# Altium PCB main.PcbDoc
Units mil, origin at the board's own origin, x right, y up, seen from the top; angles counter-clockwise.
Board outline 21485 x 13020 mil, 2 copper layers (Top Layer, Bottom Layer); 70 components, 79 nets, 285 pads, 0 vias.
Unrouted connection lines stored in the file: 74.
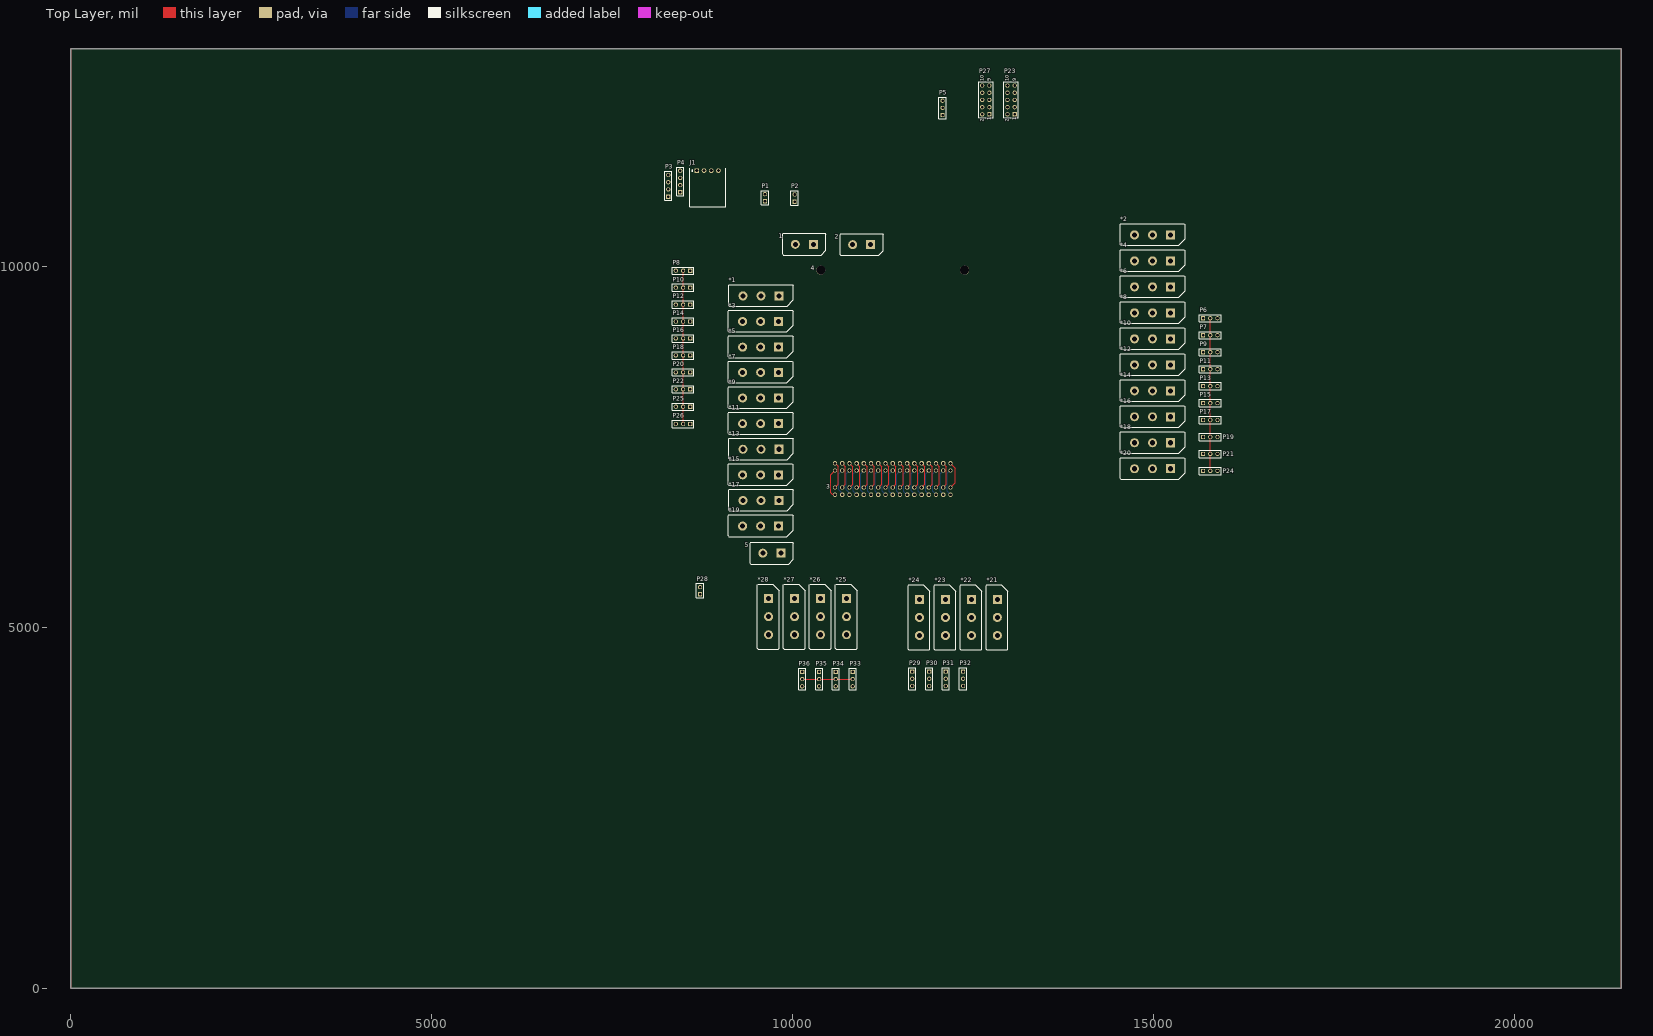
[diagram p0: Top Layer view]
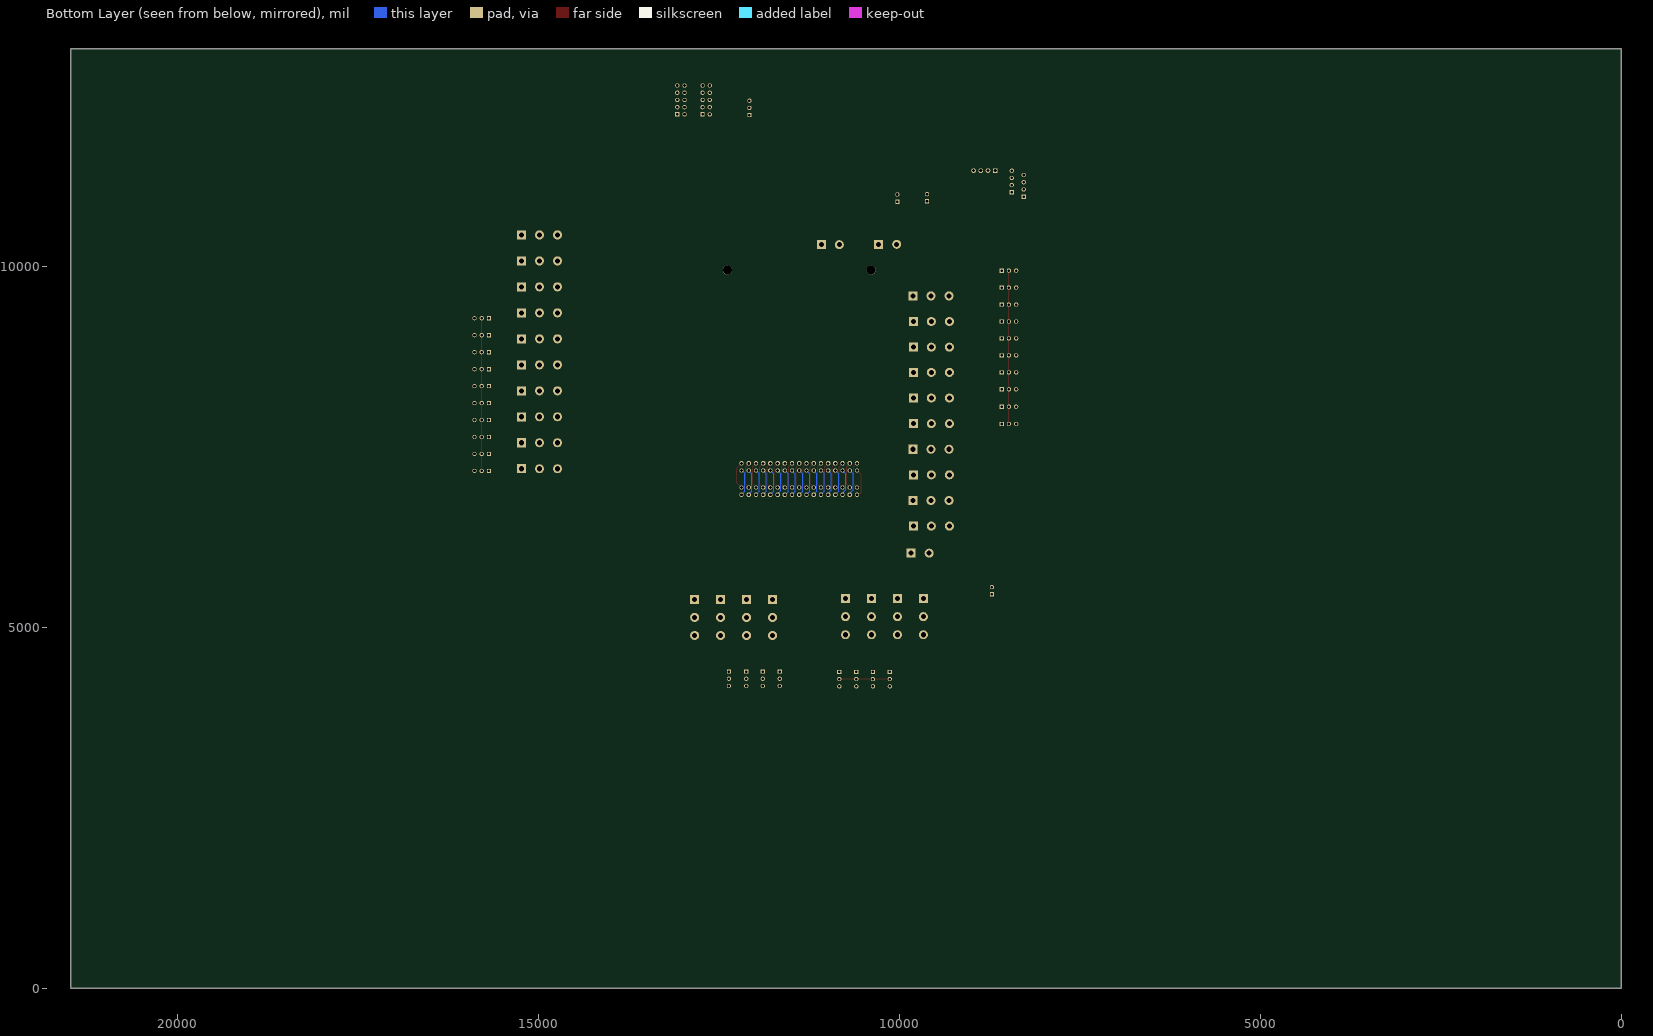
[diagram p1: Bottom Layer view, seen from below]

## Layer stack, top to bottom
Top Solder: solder mask 0.4, Solder Resist, Dk 3.5
Top Layer: signal copper 1.4
Dielectric 1: dielectric 12.6, FR-4, Dk 4.8
Bottom Layer: signal copper 1.4
Bottom Solder: solder mask 0.4, Solder Resist, Dk 3.5

## Board outline
0,0 21485,0 21485,13020 0,13020

## Design rules (kind name [scope] priority, off if disabled: settings)
Clearance [All] p1: gap=10 ignorepadtopadclearanceinfootprint=FALSE except(0: Arc-Hole Track-Hole SMDPad-Hole THPad-Hole Via-Hole Fill-Hole Poly-Hole Region-Hole Text-Hole)
PolygonConnect [All] p1: connectstyle=Relief reliefconductorwidth=10 reliefentries=4 polygonreliefangle="90 Angle" airgapwidth=10
RoutingVias [All] p1: holewidth=28 width=50 viastyle="Through Hole" minholewidth=28 minwidth=50 maxholewidth=28 maxwidth=50
SolderMaskExpansion [All] p1: expansion=4
Width [All] p1: maxlimit=10 minlimit=10 preferedwidth=10
30 further rules are at their usual default settings.

## Components (designator, comment, footprint, x,y, rotation, side; value= is the part's Value field where it differs from the comment)
1 "Component_1" 2pinmolex 10290,10310 r180 top
2 "Component_1" 2pinmolex 11085,10305 r180 top
3 "RREXTENSION-MALE" RREXT-MALE 11390,6890 r180 top
4 "RRINTERFACE-FEMALE" RRINT-FEMALE 11390,7225 r180 top
5 "Component_1" 2pinmolex 9840,6030 r180 top
*1 "Component_1" 3pinmolex 9815,9595 r180 top
*2 "Component_1" 3pinmolex 15240,10440 r180 top
*3 "Component_1" 3pinmolex 9810,9240 r180 top
*4 "Component_1" 3pinmolex 15240,10080 r180 top
*5 "Component_1" 3pinmolex 9810,8885 r180 top
*6 "Component_1" 3pinmolex 15240,9720 r180 top
*7 "Component_1" 3pinmolex 9810,8535 r180 top
*8 "Component_1" 3pinmolex 15240,9360 r180 top
*9 "Component_1" 3pinmolex 9810,8180 r180 top
*10 "Component_1" 3pinmolex 15240,9000 r180 top
*11 "Component_1" 3pinmolex 9810,7825 r180 top
*12 "Component_1" 3pinmolex 15240,8640 r180 top
*13 "Component_1" 3pinmolex 9815,7470 r180 top
*14 "Component_1" 3pinmolex 15240,8280 r180 top
*15 "Component_1" 3pinmolex 9810,7115 r180 top
*16 "Component_1" 3pinmolex 15240,7920 r180 top
*17 "Component_1" 3pinmolex 9815,6760 r180 top
*18 "Component_1" 3pinmolex 15240,7560 r180 top
*19 "Component_1" 3pinmolex 9810,6405 r180 top
*20 "Component_1" 3pinmolex 15240,7200 r180 top
*21 "Component_1" 3pinmolex 12840,5390 r270 top
*22 "Component_1" 3pinmolex 12480,5390 r270 top
*23 "Component_1" 3pinmolex 12120,5390 r270 top
*24 "Component_1" 3pinmolex 11760,5390 r270 top
*25 "Component_1" 3pinmolex 10750,5400 r270 top
*26 "Component_1" 3pinmolex 10390,5400 r270 top
*27 "Component_1" 3pinmolex 10030,5400 r270 top
*28 "Component_1" 3pinmolex 9670,5400 r270 top
J1 "0705530003" *MOLEX_0705530003 8675,11330 r0 top
P1 "Header 2" HDR1X2 9620,10905 r90 top
P2 "Header 2" HDR1X2 10030,10900 r90 top
P3 "Header 4" HDR1X4 8280,10970 r90 top
P4 "Header 4" HDR1X4 8445,11030 r90 top
P5 "Header 3" HDR1X3 12080,12100 r90 top
P6 "Header 3" HDR1X3 15690,9285 r0 top
P7 "Header 3" HDR1X3 15690,9050 r0 top
P8 "Header 3" HDR1X3 8585,9945 r180 top
P9 "Header 3" HDR1X3 15690,8815 r0 top
P10 "Header 3" HDR1X3 8585,9710 r180 top
P11 "Header 3" HDR1X3 15690,8580 r0 top
P12 "Header 3" HDR1X3 8585,9475 r180 top
P13 "Header 3" HDR1X3 15690,8345 r0 top
P14 "Header 3" HDR1X3 8585,9240 r180 top
P15 "Header 3" HDR1X3 15690,8110 r0 top
P16 "Header 3" HDR1X3 8585,9005 r180 top
P17 "Header 3" HDR1X3 15690,7875 r0 top
P18 "Header 3" HDR1X3 8585,8770 r180 top
P19 "Header 3" HDR1X3 15690,7640 r0 top
P20 "Header 3" HDR1X3 8585,8535 r180 top
P21 "Header 3" HDR1X3 15690,7405 r0 top
P22 "Header 3" HDR1X3 8585,8300 r180 top
P23 "Header 5X2" HDR2X5 13080,12110 r90 top
P24 "Header 3" HDR1X3 15690,7170 r0 top
P25 "Header 3" HDR1X3 8585,8060 r180 top
P26 "Header 3" HDR1X3 8585,7820 r180 top
P27 "Header 5X2" HDR2X5 12730,12110 r90 top
P28 "Header 2" HDR1X2 8720,5460 r90 top
P29 "Header 3" HDR1X3 11660,4390 r270 top
P30 "Header 3" HDR1X3 11895,4390 r270 top
P31 "Header 3" HDR1X3 12125,4390 r270 top
P32 "Header 3" HDR1X3 12365,4390 r270 top
P33 "Header 3" HDR1X3 10835,4385 r270 top
P34 "Header 3" HDR1X3 10600,4385 r270 top
P35 "Header 3" HDR1X3 10370,4385 r270 top
P36 "Header 3" HDR1X3 10135,4385 r270 top

## Footprints (in the part's own frame and the unit in brackets; to place one, negate y for a bottom-side part, rotate by r counter-clockwise, add the part's x,y. Pads: shape width x height; smd on the part's side, far side on the other; paste and mask are expansions set on the pad)
2pinmolex [mil]
  rect 125x125 hole 70: 1(0,0)
  round 125 hole 70: 2(250,0)
  silkscreen extent -175,-150 425,150
3pinmolex [mil]
  rect 125x125 hole 70: 1(0,0)
  round 125 hole 70: 2(250,0) 3(500,0)
  silkscreen extent -200,-155 700,145
*MOLEX_0705530003 [mm]
  rect 1.635x1.635 hole 1.09: 1(0,0)
  round 1.635 hole 1.09: 2(2.54,0) 3(5.08,0) 4(7.62,0)
  silkscreen extent -2.55,-12.66 10.17,0.92
HDR1X2 [mm] "Connector; Header; 2 Position"
  rect 1.5x1.5 hole 0.9: 1(0,0)
  round 1.5 hole 0.9: 2(2.54,0)
  silkscreen extent -1.27,-1.27 3.81,1.27
HDR1X3 [mm] "Connector; Header; 3 Position"
  rect 1.5x1.5 hole 0.9: 1(0,0)
  round 1.5 hole 0.9: 2(2.54,0) 3(5.08,0)
  silkscreen extent -1.27,-1.27 6.35,1.27
HDR1X4 [mm] "Connector; Header; 4 Position"
  rect 1.5x1.5 hole 0.9: 1(0,0)
  round 1.5 hole 0.9: 2(2.54,0) 3(5.08,0) 4(7.62,0)
  silkscreen extent -1.27,-1.27 8.89,1.27
HDR2X5 [mm] "Connector; Header; 5x2 Position"
  rect 1.5x1.5 hole 0.9: 1(0,0)
  round 1.5 hole 0.9: 2(0,2.54) 3(2.54,0) 4(2.54,2.54) 5(5.08,0) 6(5.08,2.54) 7(7.62,0) 8(7.62,2.54) 9(10.16,0) 10(10.16,2.54)
  silkscreen extent -1.27,-1.27 11.43,3.81
RREXT-MALE [mil]
  oct 60x60 hole 40: 1(-800,-50) 2(-800,50) 3(-700,-50) 4(-700,50) 5(-600,-50) 6(-600,50) 7(-500,-50) 8(-500,50) 9(-400,-50) 10(-400,50) 11(-300,-50) 12(-300,50) 13(-200,-50) 14(-200,50) 15(-100,-50) 16(-100,50) 17(0,-50) 18(0,50) 19(100,-50) 20(100,50) 21(200,-50) 22(200,50) 23(300,-50) 24(300,50) 25(400,-50) 26(400,50) 27(500,-50) 28(500,50) 29(600,-50) 30(600,50) 31(700,-50) 32(700,50) 33(800,-50) 34(800,50)
RRINT-FEMALE [mil]
  oct 60x60 hole 40: 1(-800,-50) 2(-800,50) 3(-700,-50) 4(-700,50) 5(-600,-50) 6(-600,50) 7(-500,-50) 8(-500,50) 9(-400,-50) 10(-400,50) 11(-300,-50) 12(-300,50) 13(-200,-50) 14(-200,50) 15(-100,-50) 16(-100,50) 17(0,-50) 18(0,50) 19(100,-50) 20(100,50) 21(200,-50) 22(200,50) 23(300,-50) 24(300,50) 25(400,-50) 26(400,50) 27(500,-50) 28(500,50) 29(600,-50) 30(600,50) 31(700,-50) 32(700,50) 33(800,-50) 34(800,50)
  round 125 hole 125 unplated: MH1(-997,-2727) MH2(997,-2727)

## Part data
3: Package=RREXT-MALE, DeviceSetName=RREXTENSION-MALE, GateName_1=G$2, LibraryName=RoboRioConnector, SymbolName_1=RR_EXTENSION_MALE
4: Package=RRINT-FEMALE, DeviceSetName=RRINTERFACE-FEMALE, GateName_1=G$1, LibraryName=RoboRioConnector, SymbolName_1=RR_INTERFACE_FEMALE
J1: "Conn Shrouded Header HDR 4 POS 2.54mm Solder RA Thru-Hole SLÃ¢â¢ Tube", Package=None, Digi-Key_Part_Number=WM4902-ND, Digi-Key_Purchase_URL=https://www.digikey.com/product-detail/en/molex/0705530003/WM4902-ND/114959?utm_source=snapeda&utm_medium=aggregator&utm_campaign=symbol, MF=Molex, MP=0705530003, SnapEDA_Link=https://www.snapeda.com/parts/0705530003/Molex/view-part/?ref=snap
P1 P2 P28: "Header, 2-Pin", LatestRevisionDate=17-Jul-2002, LatestRevisionNote="Re-released for DXP Platform.", Publisher="Altium Limited"
P3 P4: "Header, 4-Pin", LatestRevisionDate=17-Jul-2002, LatestRevisionNote="Re-released for DXP Platform.", Publisher="Altium Limited"
P5 P6 P7 P8 P9 P10 P11 P12 P13 P14 P15 P16 P17 P18 P19 P20 P21 P22 P24 P25 P26 P29 P30 P31 P32 P33 P34 P35 P36: "Header, 3-Pin", LatestRevisionDate=17-Jul-2002, LatestRevisionNote="Re-released for DXP Platform.", Publisher="Altium Limited"
P23 P27: "Header, 5-Pin, Dual row", LatestRevisionDate=17-Jul-2002, LatestRevisionNote="Re-released for DXP Platform.", Publisher="Altium Limited"

## Nets (pads, with @x,y where several pads share a name; then routed paths per layer and width w, separated by ;. In a path a pad name is that pad's centre, name@x,y a point inside that pad or via, vN(x,y) a via of type N, cw(c..) or ccw(c..) an arc to the next point about the centre after c; other vN are vias at no path point)
1: 3.1 4.1 | length 388.8
  Top Layer w10: 3.1 12255,7005 12255,7210 4.1
2: 3.2 4.2 | length 378.1
  Bottom Layer w10: 3.2 12145,6885 12145,7140 12180,7175 4.2
3: 3.3 4.3 | length 372.3
  Top Layer w10: 3.3 12135,6985 12135,7230 4.3
3V3: J1.3 P3.2 P4.2
4: 3.4 4.4 | length 372.3
  Bottom Layer w10: 3.4 12090,6845 12045,6890 12045,7130 4.4
5: 3.5 4.5 | length 372.3
  Top Layer w10: 3.5 12035,6985 12035,7230 4.5
6V: *2.2 *4.2 *6.2 *8.2 *10.2 *12.2 *14.2 *16.2 *18.2 *20.2 P6.2 P7.2 P9.2 P11.2 P13.2 P15.2 P17.2 P19.2 P21.2 P24.2 | length 2115
  Top Layer w10: P24.2 P21.2 P19.2 P17.2 P15.2 P13.2 P11.2 P9.2 P7.2 P6.2
7: 3.7 4.7 | length 372.3
  Top Layer w10: 3.7 11935,6985 11935,7230 4.7
9: 3.9 4.9 | length 372.3
  Top Layer w10: 3.9 11835,6985 11835,7230 4.9
10: 3.10 4.10 | length 372.3
  Bottom Layer w10: 3.10 11745,6885 11745,7130 4.10
11: 3.11 4.11 | length 372.3
  Top Layer w10: 3.11 11735,6985 11735,7230 4.11
12+: 2.1 P2.1
12-: 2.2 P2.2
13: 3.13 4.13 | length 372.3
  Top Layer w10: 3.13 11635,6985 11635,7230 4.13
14: 3.14 4.14 | length 375.2
  Bottom Layer w10: 3.14 11585,6840 11545,6880 11545,7130 4.14
15: 3.15 4.15 | length 372.3
  Top Layer w10: 3.15 11535,6985 11535,7230 4.15
17: 3.17 4.17 | length 372.3
  Top Layer w10: 3.17 11435,6985 11435,7230 4.17
18: 3.18 4.18 | length 374.7
  Bottom Layer w10: 3.18 11355,6875 11350.86,6875 11345,6880.86 11345,7130 4.18
19: 3.19 4.19 | length 372.3
  Top Layer w10: 3.19 11335,6985 11335,7230 4.19
21: 3.21 4.21 | length 372.3
  Top Layer w10: 3.21 11235,6985 11235,7230 4.21
22: 3.22 4.22 | length 372.3
  Bottom Layer w10: 3.22 11145,6885 11145,7130 4.22
23: 3.23 4.23 | length 372.3
  Top Layer w10: 3.23 11135,6985 11135,7230 4.23
25: 3.25 4.25 | length 372.3
  Top Layer w10: 3.25 11035,6985 11035,7230 4.25
26: 3.26 4.26 | length 372.3
  Bottom Layer w10: 3.26 10977.07,6852.93 10977.07,6872.93 10945,6905 10945,7130 4.26
27: 3.27 4.27 | length 386.9
  Top Layer w10: 3.27 10915,6940 10935,6960 10935,7230 4.27
29: 3.29 4.29 | length 372.3
  Top Layer w10: 3.29 10835,6985 10835,7230 4.29
31: 3.31 4.31 | length 372.3
  Top Layer w10: 3.31 10735,6985 10735,7230 4.31
32: 3.32 4.32 | length 372.3
  Bottom Layer w10: 3.32 10679.39,6850.61 10679.39,6875.61 10645,6910 10645,7130 4.32
33: 3.33 4.33 | length 375.7
  Top Layer w10: 3.33 10635,6985 10635,7235.86 10595.86,7275 4.33
34: 3.34 4.34 | length 402.3
  Top Layer w10: 3.34 10581.89,6848.11 10551.89,6848.11 10530,6870 10530,7115 4.34
A_0: *25.3 P33.1
A_1: *26.3 P34.1
A_2: *27.3 P35.1
A_3: *28.3 P36.1
DIO_0: *1.3 P8.3
DIO_1: *3.3 P10.3
DIO_2: *5.3 P12.3
DIO_3: *7.3 P14.3
DIO_4: *9.3 P16.3
DIO_5: *11.3 P18.3
DIO_6: *13.3 P20.3
DIO_7: *15.3 P22.3
DIO_8: *17.3 P25.3
DIO_9: *19.3 P26.3
FWD_0: *21.3 P29.1
FWD_1: *22.3 P30.1
FWD_2: *23.3 P31.1
FWD_3: *24.3 P32.1
GND: 3.6 3.8 3.12 3.16 3.20 3.24 3.28 3.30 4.6 4.8 4.12 4.16 4.20 4.24 4.28 4.30 5.2 *1.1 *2.1 *3.1 *4.1 *5.1 *6.1 *7.1 *8.1 *9.1 *10.1 *11.1 *12.1 *13.1 *14.1 *15.1 *16.1 *17.1 *18.1 *19.1 *20.1 *21.1 *22.1 *23.1 *24.1 *25.1 *26.1 *27.1 *28.1 J1.1 P3.1 P4.1 P5.1 P6.1 P7.1 P8.1 P9.1 P10.1 P11.1 P12.1 P13.1 P14.1 P15.1 P16.1 P17.1 P18.1 P19.1 P20.1 P21.1 P22.1 P23.1 P24.1 P25.1 P26.1 P27.1 P28.2 P29.3 P30.3 P31.3 P32.3 P33.3 P34.3 P35.3 P36.3 | length 2984.1
  Bottom Layer w10: 3.30 10779.39,6850.61 10779.39,6875.61 10745,6910 10745,7130 4.30 ; 3.28 10845,6885 10845,7130 4.28 ; 3.24 11045,6885 11045,7140 11080,7175 4.24 ; 3.20 11245,6885 11245,7130 4.20 ; 3.16 11445,6885 11445,7125 11490,7170 4.16 ; 3.12 11690,6850 11645,6895 11645,7130 4.12 ; 3.8 11845,6885 11845,7130 4.8 ; 3.6 11990,6845 11945,6890 11945,7130 4.6
H: 1.2 P1.2
L: 1.1 P1.1
NetJ2_1: P23.2
NetJ2_3: P23.6
NetJ2_4: P23.8
NetJ3_2: P27.8
NetJ3_3: P27.6
NetJ3_5: P27.2
PWM_0: *2.3 P6.3
PWM_1: *4.3 P7.3
PWM_2: *6.3 P9.3
PWM_3: *8.3 P11.3
PWM_4: *10.3 P13.3
PWM_5: *12.3 P15.3
PWM_6: *14.3 P17.3
PWM_7: *16.3 P19.3
PWM_8: *18.3 P21.3
PWM_9: *20.3 P24.3
R1IN_2: P23.4 P27.5 P27.10
REV_0: *21.2 P29.2
REV_1: *22.2 P30.2
REV_2: *23.2 P31.2
REV_3: *24.2 P32.2
RS232_RXD: P5.2 P23.5
RS232_TXD: P5.3 P23.7
RSL: 5.1 P28.1
SCL: J1.4 P3.3 P4.3
SDA: J1.2 P3.4 P4.4
T1OUT_2: P23.10 P27.4 P27.7
VCC: *1.2 *3.2 *5.2 *7.2 *9.2 *11.2 *13.2 *15.2 *17.2 *19.2 *25.2 *26.2 *27.2 *28.2 P8.2 P10.2 P12.2 P14.2 P16.2 P18.2 P20.2 P22.2 P25.2 P26.2 P33.2 P34.2 P35.2 P36.2 | length 2825
  Top Layer w10: P26.2 P25.2 P22.2 P20.2 P18.2 P16.2 P14.2 P12.2 P10.2 P8.2 ; P36.2 P35.2 P34.2 P33.2
pads on no net: 4.MH1 4.MH2 P23.3 P23.9 P27.3 P27.9

## Polygon pours and split planes (outlines as drawn)
GND on Top Layer "NONET_L01_P002" (solid, shelved, pour order 2): 0,0 21485,0 21485,13020 0,13020
GND on Top Layer "NONET_L01_P001" (solid, shelved, pour order 1): 0,0 21485,0 21485,13020 0,13020

## Silkscreen, mask and mechanical layers (free items; w line width, h text height)
Mechanical 5:
  lines w10: 6525,3385 6525,3620 ; 8385,8060 8385,8295 ; 8385,8300 8385,8535 8385,8770 8385,9005 8385,9240 8385,9475 ; 8385,9710 8385,9945 ; 8485,7820 8485,8055 ; 8485,9475 8485,9710 ; 10135,4185 10370,4185 ; 12130,4190 12188.75,4190 12306.25,4190 12365,4190 ; 15890,7170 15890,7405 ; 15890,7640 15890,7875 ; 15890,8110 15890,8345 15890,8580 ; 15890,9050 15890,9285 ; 15895,8980 15895,9215

## Text inside footprints (layer, text, board x,y; h text height)
P23: Top Overlay "10" at 13000,12570 h50 r90; Top Overlay "9" at 13100,12570 h50 r90; Top Overlay "1" at 13100,12030 h50 r90; Top Overlay "2" at 13000,12010 h50 r90
P27: Top Overlay "10" at 12650,12570 h50 r90; Top Overlay "9" at 12750,12570 h50 r90; Top Overlay "1" at 12750,12030 h50 r90; Top Overlay "2" at 12650,12010 h50 r90